# Altium PCB AVR_ISP_mkii_clone.PcbDoc
Units mm, origin at the board's own origin, x right, y up, seen from the top; angles counter-clockwise.
Board outline 57.87 x 20.93 mm, 2 copper layers (Top Layer, Bottom Layer); 38 components, 33 nets, 141 pads, 71 vias.
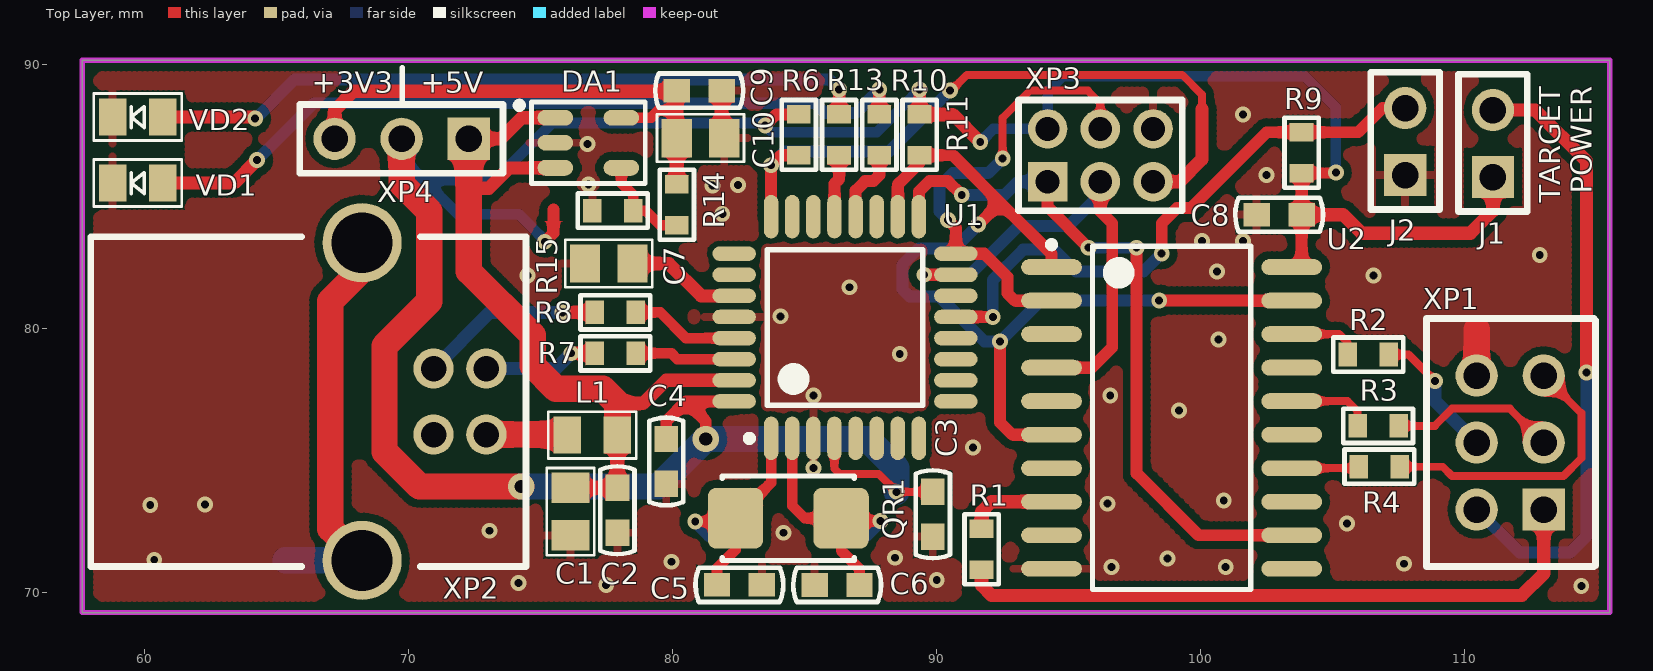
[diagram p0: Top Layer view]
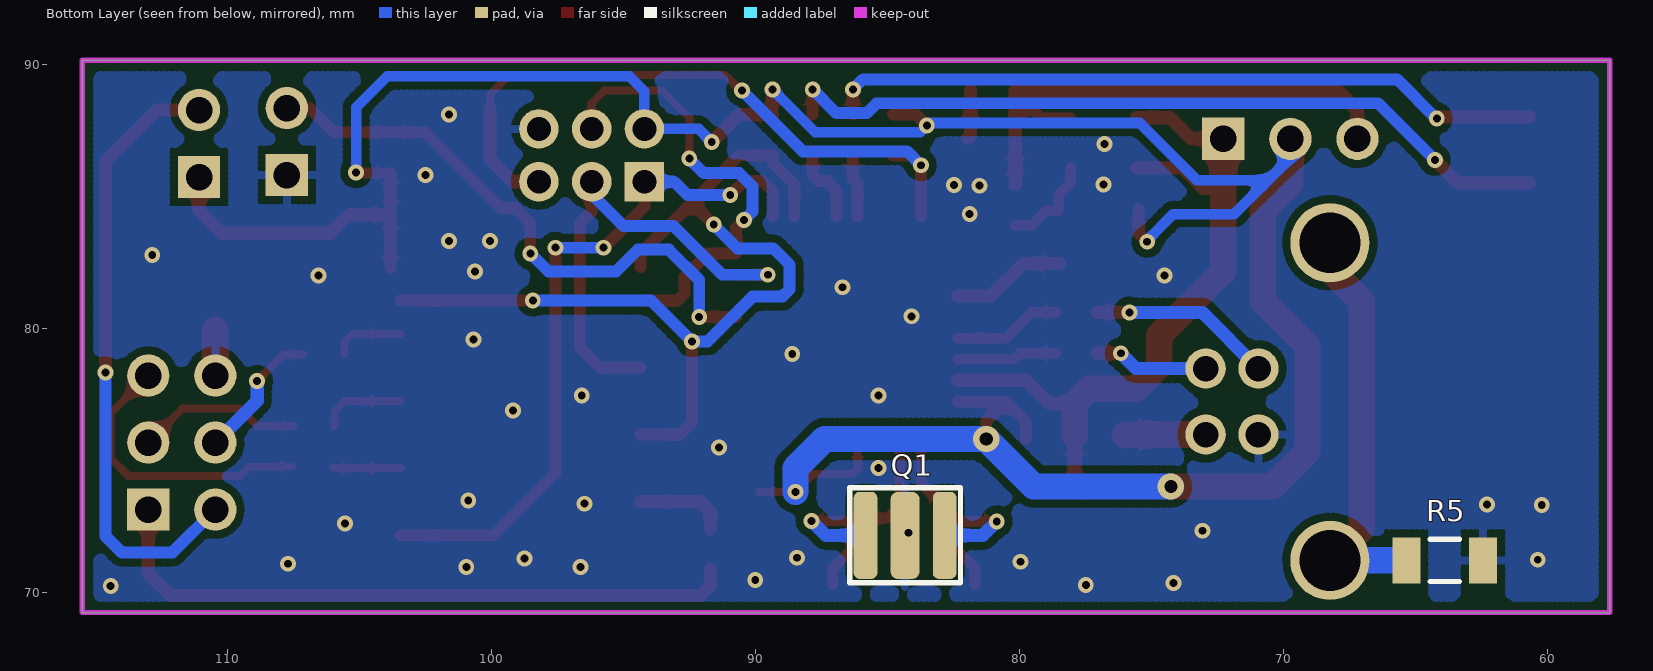
[diagram p1: Bottom Layer view, seen from below]

## Layer stack, top to bottom
Top Solder: solder mask 0.0102, Solder Resist, Dk 3.5
Top Layer: signal copper 0.0356
Dielectric 1: dielectric 0.32, FR-4, Dk 4.8
Bottom Layer: signal copper 0.0356
Bottom Solder: solder mask 0.0102, Solder Resist, Dk 3.5

## Board outline
57.625,69.25 57.625,90.175 115.5,90.175 115.5,69.25

## Design rules (kind name [scope] priority, off if disabled: settings)
Clearance Clearance_1 [InComponent('U1')] p1: gap=0.2 ignorepadtopadclearanceinfootprint=FALSE
Clearance [All] p2: gap=0.3 ignorepadtopadclearanceinfootprint=FALSE
ComponentClearance [All] p1: gap=0.1 collisioncheckmode=3 verticalgap=2540 showdistances=FALSE
HoleSize [All] p1: absolutevalues=TRUE maxlimit=10 minlimit=0.025 maxpercent=80.000 minpercent=20.000
MinimumSolderMaskSliver [All] p1: minsoldermaskwidth=0.05
PolygonConnect PolygonConnect_1 [IsVia] p1: connectstyle=Direct reliefconductorwidth=0.254 reliefentries=4 polygonreliefangle="90 Angle" airgapwidth=0.254
PolygonConnect [All] p2: connectstyle=Relief reliefconductorwidth=0.3 reliefentries=4 polygonreliefangle="90 Angle" airgapwidth=0.3
RoutingVias [All] p1: holewidth=0.4 width=0.8 viastyle="Through Hole" minholewidth=0.3 minwidth=0.6 maxholewidth=0.5 maxwidth=1
SilkToSilkClearance [All] p1: silktosilkclearance=0.1
SilkToSolderMaskClearance [IsPad] p1: minsilkscreentomaskgap=0.05 clearancetoexposedcopper=TRUE
SolderMaskExpansion [All] p1: expansion=0.102
Width [All] p1: maxlimit=3 minlimit=0.2 preferedwidth=0.5
25 further rules are at their usual default settings.

## Classes and differential pairs
component class Power: C9 C10 DA1 R14 R15
component class MCU: C3 C4 C5 C6 C7 C8 J2 Q1 QR1 R6 R7 R8 R9 R10 R11 R13 U1 U2 VD1 VD2 XP4
component class Connections: C1 C2 J1 L1 R1 R2 R3 R4 R5 XP1 XP2 XP3

## Components (designator, comment, footprint, x,y, rotation, side; value= is the part's Value field where it differs from the comment)
C1 "10uF" CC0805 76.125,73.075 r90 top
C2 "0.1uF" CC0603 77.9,73.125 r90 top
C3 "0.1uF" CC0603 89.85,72.975 r270 top
C4 "0.1uF" CC0603 79.75,74.975 r270 top
C5 "22pF" CC0603 82.525,70.3 r180 top
C6 "22pF" CC0603 86.225,70.298 r0 top
C7 "10uF" CC0805 77.575,82.475 r0 top
C8 "0.1uF" CC0603 102.975,84.325 r180 top
C9 "0.1uF" CC0603 81,89.025 r0 top
C10 "10uFx6.3V" CC0805 81.05,87.225 r180 top
DA1 "AP2210K-ADJTRG1" SOT23-5 76.8,87.05 r0 top
J1 "PLS-02" PLS-02 111.075,85.75 r90 top
J2 "PLS-02" PLS-02 107.75,85.825 r90 top
L1 "L0805" RC0805 76.95,75.975 r0 top value=10uH
Q1 "n.p" AWSCR-16MHz 84.325,72.175 r90 bottom value=AWSCR-16MHz
QR1 "16MHz" AC5032_2 84.375,72.825 r0 top
R1 "68E" RC0603 91.7,71.65 r270 top
R2 "68E" RC0603 106.35,79.025 r180 top
R3 "68E" RC0603 106.725,76.325 r0 top
R4 "68E" RC0603 106.775,74.775 r0 top
R5 "1M" RC1206 63.875,71.225 r0 bottom
R6 "10k" RC0603 84.775,87.35 r90 top
R7 "22E" RC0603 77.825,79.075 r0 top
R8 "22E" RC0603 77.825,80.625 r0 top
R9 "10k" RC0603 103.825,86.675 r270 top
R10 "220E" RC0603 87.825,87.35 r270 top
R11 "10k" RC0603 89.35,87.35 r270 top
R13 "220E" RC0603 86.3,87.35 r270 top
R14 "11k 1%" RC0603 80.15,84.7 r90 top
R15 "18k 1%" RC0603 77.725,84.475 r0 top
U1 "90USB162-16AU" 32MA_N 86.525,80.05 r90 top
U2 "SN74HC244DW" DW020_N 98.9,76.625 r0 top
VD1 "LED_0805" LED0805 60.675,85.525 r180 top
VD2 "LED_0805" LED0805 60.675,88.025 r180 top
XP1 "PLD06" PIN6 113,73.15 r90 top
XP2 "USB_B" USB-B 72.935,75.995 r0 top
XP3 "PLD2-06" PLD2-06 94.2,85.575 r0 top
XP4 "PLS03" PLS-03 72.265,87.2 r180 top

## Footprints (in the part's own frame and the unit in brackets; to place one, negate y for a bottom-side part, rotate by r counter-clockwise, add the part's x,y. Pads: shape width x height; smd on the part's side, far side on the other; paste and mask are expansions set on the pad)
32MA_N [mm] "Thin QFP, 32-Leads, Body 7x7mm, Pitch 0.8mm, IPC Medium Density"
  oval 1.65x0.55 smd mask+0.076: 1(-4.2,2.8) 2(-4.2,2) 3(-4.2,1.2) 4(-4.2,0.4) 5(-4.2,-0.4) 6(-4.2,-1.2) 7(-4.2,-2) 8(-4.2,-2.8) 17(4.2,-2.8) 18(4.2,-2) 19(4.2,-1.2) 20(4.2,-0.4) 21(4.2,0.4) 22(4.2,1.2) 23(4.2,2) 24(4.2,2.8)
  oval 0.55x1.65 smd mask+0.076: 9(-2.8,-4.2) 10(-2,-4.2) 11(-1.2,-4.2) 12(-0.4,-4.2) 13(0.4,-4.2) 14(1.2,-4.2) 15(2,-4.2) 16(2.8,-4.2) 25(2.8,4.2) 26(2,4.2) 27(1.2,4.2) 28(0.4,4.2) 29(-0.4,4.2) 30(-1.2,4.2) 31(-2,4.2) 32(-2.8,4.2)
  silkscreen extent -4.32,-2.95 2.95,3.75, body extent -3.5,-3.5 3.5,3.5, height 1.2
AC5032_2 [mm]
  rrect30% 2.1x2.3 smd mask+0.076: 1(-2,0) 2(2,0)
  silkscreen extent -2.5,-1.6 2.5,1.6
AWSCR-16MHz [mm]
  rrect50% 3.3x0.9 smd mask+0.076: 1(0,1.5) 2(0,-1.5)
  rrect50% 3.3x1.1 smd mask+0.076: 3(0,0)
  silkscreen extent -1.8,-2.1 1.8,2.1
CC0603 [mm]
  rect 1x0.9 smd paste-25.4 mask+0.076: 1(-0.85,0) 2(0.85,0)
  silkscreen extent -1.66,-0.65 1.66,0.65
CC0805 [mm]
  rect 1.15x1.45 smd paste-25.4 mask+0.076: 1(-0.9,0) 2(0.9,0)
  silkscreen extent -1.65,-0.9 1.65,0.9
DW020_N [mm] "SOIC, 20-Leads, Body 12.8x7.5mm, Pitch 1.27mm, IPC Medium Density"
  oval 2.3x0.6 smd mask+0.076: 1(-4.55,5.715) 2(-4.55,4.445) 3(-4.55,3.175) 4(-4.55,1.905) 5(-4.55,0.635) 6(-4.55,-0.635) 7(-4.55,-1.905) 8(-4.55,-3.175) 9(-4.55,-4.445) 10(-4.55,-5.715) 11(4.55,-5.715) 12(4.55,-4.445) 13(4.55,-3.175) 14(4.55,-1.905) 15(4.55,-0.635) 16(4.55,0.635) 17(4.55,1.905) 18(4.55,3.175) 19(4.55,4.445) 20(4.55,5.715)
  silkscreen extent -4.67,-6.5 3,6.69, body extent -3.75,-6.5 3.75,6.5, height 2.65
LED0805 [mm]
  rect 1.05x1.4 smd paste-25.4: 1(0,0) 2(1.9,0)
  silkscreen extent -0.72,-0.89 2.62,0.89
PIN6 [mm]
  rect 1.6x1.6 hole 1 mask+0.076: 1(0,0)
  round 1.6 hole 1 mask+0.076: 2(0,2.54) 3(2.54,0) 4(2.54,2.54) 5(5.08,0) 6(5.08,2.54)
  silkscreen extent -2.16,-1.96 7.24,4.45
PLD2-06 [mm]
  rect 1.5x1.5 hole 0.9 mask+0.076: 1(0,0)
  round 1.5 hole 0.9 mask+0.076: 2(0,2) 3(2,0) 4(2,2) 5(4,0) 6(4,2)
  silkscreen extent -1.1,-1.1 5.1,3.1
PLS-02 [mm]
  rect 1.6x1.6 hole 1 mask+0.076: 1(0,0)
  round 1.6 hole 1 mask+0.076: 2(2.54,0)
  silkscreen extent -1.3,-1.3 3.9,1.3
PLS-03 [mm]
  rect 1.6x1.6 hole 1 mask+0.076: 1(0,0)
  round 1.6 hole 1 mask+0.076: 2(2.54,0) 3(5.08,0)
  silkscreen extent -1.3,-1.3 6.4,1.3
RC0603 [mm]
  rect 0.7x0.9 smd paste-25.4 mask+0.076: 1(-0.775,0) 2(0.774,0)
  silkscreen extent -1.32,-0.65 1.33,0.65
RC0805 [mm]
  rect 1.05x1.4 smd paste-25.4 mask+0.076: 1(-0.95,0) 2(0.95,0)
  silkscreen extent -1.67,-0.89 1.67,0.89
RC1206 [mm]
  rect 1.05x1.75 smd paste-25.4 mask+0.076: 1(-1.45,0) 2(1.45,0)
  silkscreen extent -0.55,-0.8 0.55,0.8
SOT23-5 [mm]
  oval 1.35x0.6 smd mask+0.076: 1(-1.25,0.95) 2(-1.25,0) 3(-1.25,-0.95) 4(1.25,-0.95) 5(1.25,0.95)
  silkscreen extent -2.74,-1.55 2.16,1.55
USB-B [mm]
  round 1.524 hole 0.965 mask+0.076: 1(0,0) 2(0,2.5) 3(-2,2.5) 4(-2,0)
  round 3 hole 2.3 mask+0.076: 5(-4.71,7.27) 6(-4.71,-4.77)
  silkscreen extent -14.99,-5 1.5,7.5

## Part data
C1 C7 C10: library part CC0805, "CC0805"
C2 C3 C4 C5 C6 C8 C9: library part CC0603, "CC0603"
DA1: library part MCP1824T-ADJE/OT, "300 mA, Low Voltage, Low Quiescent Current LDO Regulator, 5-Pin SOT-223, Extended Temperature, Tape and Reel", ComponentLink1Description="Manufacturer Link", ComponentLink1URL=http://www.microchip.com, ComponentLink2Description=Datasheet, ComponentLink2URL=http://ww1.microchip.com/downloads/en/DeviceDoc/22070a.pdf, ComponentLink3Description="Packaging Specification", ComponentLink3URL=http://ww1.microchip.com/downloads/en/PackagingSpec/00049AW.pdf, DatasheetVersion="revA, Aug-2007", PackageDescription="5-Lead Plastic Small Outline Transistor (DC) [SOT-223]", PackageReference=SOT-223-DC5, PackageVersion="revAW, Oct-2008", Published=29-Jan-2009, Publisher="Altium Limited"
Q1: library part Q_AWSCR-16MHz, n.p=n.p
QR1: library part AC5032_2, "AC5032/2"
R1 R2 R3 R4 R6 R7 R8 R9 R10 R11 R13 R14 R15: library part RC0603, "RC0603"
R5: library part RC1206, "RC1206"
U1: "8-bit AVR Microcontroller, 2.7-5.5V, 16KB Flash, 512 Bytes EEPROM, 512 Bytes SRAM, USB Controller, 32-pin TQFP, Industrial Grade (-40°C to 85°C)", ComponentLink1Description="Manufacturer Link", ComponentLink1URL=http://www.atmel.com/products/avr/default.asp?, ComponentLink2Description="AT90USB82/162 Datasheet", ComponentLink2URL=http://www.atmel.com/dyn/resources/prod_documents/doc7707.pdf, ComponentLink3Description="AT90USB82/162 Summary", ComponentLink3URL=http://www.atmel.com/dyn/resources/prod_documents/7707S.pdf, ComponentLink4Description="Atmel.com Home", ComponentLink4URL=http://www.atmel.com, DatasheetVersion="revE, Nov-2008", PackageDescription="32-Lead Thin Profile Plastic Quad Flatpack (TQFP) - 7x7x1mm Body,  0.8 mm Pitch", PackageReference=32MA, PackageVersion="revB, Jul-2007", Published=1-Apr-2010, Publisher="Altium Limited"
U2: "Octal Buffer and Line Driver with 3-State Outputs", Code_IPC=SOIC127P1030-20, Code_JEDEC=MS-013, ComponentLink1Description="Manufacturer Link", ComponentLink1URL=http://www.ti.com/, ComponentLink2Description=Datasheet, ComponentLink2URL=http://www-s.ti.com/sc/ds/sn74hc244.pdf, DatasheetVersion=May-1997, LatestRevisionDate=13-Apr-2006, LatestRevisionNote="IPC-7351 Footprint Added.", PackageDescription="20-Pin Plastic Small Outline Integrated Circuit 1.27 mm Pitch", PackageReference=DW020, PackageVersion=Mar-2000, Published=8-Jun-2000, Publisher="Altium Limited"

## Via types
v1: diameter 0.6, hole 0.3, Top Layer to Bottom Layer, tented both sides, 69 vias
v2: diameter 1, hole 0.5, Top Layer to Bottom Layer, tented both sides, 2 vias

## Nets (pads, with @x,y where several pads share a name; then routed paths per layer and width w, separated by ;. In a path a pad name is that pad's centre, name@x,y a point inside that pad or via, vN(x,y) a via of type N, cw(c..) or ccw(c..) an arc to the next point about the centre after c; other vN are vias at no path point)
+3V3: C9.1 C10.2 DA1.5 R14.2 XP4.3 | length 20.1
  Top Layer w0.4: DA1.5 79.175,88 79.45,88.275 80.15,88.275
  Top Layer w0.5: XP4.3 67.185,88.285 67.9,89 80.125,89 C9.1 80.15,88.275 R14.2
ACTIVITY: R10.2 U1.20 | length 2.9
  Top Layer w0.45: U1.20 86.925,85.239 87.286,85.6 87.6,85.6 87.825,85.825 R10.2
GND: C1.1 C2.1 C3.2 C4.2 C5.1 C6.1 C7.1 C8.2 C9.2 C10.1 DA1.2 J2.1 Q1.3 R5.1 R15.1 U1.3 U1.28 U2.10 VD1.2 VD2.2 XP1.6 XP2.4 XP3.6 | length 3.6
  Top Layer w0.5: C9.2 81.85,87.325 C10.1
  Top Layer w1: XP1.6 110.46,79.965
  other v1: 114.425,70.25 77.475,70.3 74.15,70.375 90,70.488 96.625,70.975 100.95,70.975 107.7,71.1 79.95,71.175 60.35,71.25 98.75,71.3 88.425,71.325 84.2,72.275 73.05,72.35 105.55,72.625 60.2,73.325 62.275,73.35 96.475,73.375 100.875,73.5 85.325,74.725 91.375,75.5 99.175,76.9 85.325,77.475 96.575,77.475 88.6,79.05 100.675,79.6 84.075,80.475 86.7,81.575 74.5,82.025 106.55,82.025 100.625,82.175 112.85,82.8 100.05,83.325 101.6,83.325 81.875,84.35 81.5,85.425 82.475,85.45 76.8,85.475 102.5,85.825 76.774,87 101.6,88.125
MISO: U1.17 U2.12 XP3.1 | length 26.8
  Top Layer w0.45: U1.17 89.325,85.2 89.725,85.6 90.425,85.6 v1(90.95,85.075) ; XP3.1 94.2,84.625 v1(95.75,83.075) ; v1(97.575,83.075) 97.575,74.525 99.92,72.18 U2.12
  Bottom Layer w0.45: v1(90.95,85.075) 92.575,85.075 93.075,85.575 XP3.1 ; v1(95.75,83.075) v1(97.575,83.075)
MOSI: U1.16 U2.2 XP3.4 | length 17.2
  Top Layer w0.3: v1(92.5,86.45) 92.5,88 93.525,89.025 95.725,89.025 96.2,88.55 XP3.4
  Top Layer w0.45: v1(90.425,84.125) 90.725,83.825 U1.16 91.8,82.85 92.675,81.975 92.675,81.35 92.955,81.07 U2.2
  Bottom Layer w0.45: v1(90.425,84.125) 90.1,84.45 90.1,85.392 90.608,85.9 91.95,85.9 v1(92.5,86.45)
NetC5_2: C5.2 Q1.2 QR1.1 U1.1 | length 10.2
  Top Layer w0.4: v1(80.85,72.7) 82.25,72.7 QR1.1 ; C5.2 81.675,70.925 82.375,71.625 QR1.1 ; U1.1 83.725,74.175 QR1.1
  Bottom Layer w0.5: v1(80.85,72.7) 81.375,72.175 Q1.2
NetC6_2: C6.2 Q1.1 QR1.2 U1.2 | length 11.2
  Top Layer w0.4: U1.2 84.525,73.3 85,72.825 QR1.2 ; C6.2 87.075,70.9 86.375,71.6 QR1.2 ; v1(87.875,72.725) 86.475,72.725 QR1.2
  Bottom Layer w0.5: Q1.1 87.325,72.175 v1(87.875,72.725)
NetC7_2: C7.2 U1.27 | length 4.4
  Top Layer w0.5: C7.2 79.85,82.475 81.075,81.25 U1.27
NetDA1_4: DA1.4 R14.1 R15.2 | length 3.7
  Top Layer w0.4: DA1.4 78.05,85.525 78.499,85.076 R15.2 78.975,84.475 79.525,83.925 R14.1
NetJ1_2: J1.2 XP1.2 | length 23.7
  Top Layer w0.5: J1.2 112.685,88.29 114.625,86.35 v1(114.625,78.35)
  Bottom Layer w0.45: XP1.2 112.085,71.525 114,71.525 114.625,72.15 v1(114.625,78.35)
NetJ2_2: J2.2 R9.1 U1.13 | length 22.5
  Top Layer w0.45: U1.13 v1(92.125,80.45) ; v1(98.525,82.858) 98.525,84 99.1,84.575 99.625,84.575 102.5,87.45 R9.1 105.975,87.45 106.89,88.365 J2.2
  Bottom Layer w0.45: v1(92.125,80.45) 92.125,81.85 93.275,83 94.45,83 95.275,82.175 97.842,82.175 v1(98.525,82.858)
NetL1_1: L1.1 XP2.1 | length 3.1
  Top Layer w1: XP2.1 75.98,75.995 L1.1
NetR1_1: R1.1 U2.8 | length 3.5
  Top Layer w0.5: R1.1 91.7,73.075 92.075,73.45 U2.8
NetR1_2: R1.2 XP1.1 | length 24.8
  Top Layer w0.5: R1.2 91.7,70.275 92.075,69.9 112.175,69.9 113,70.725 XP1.1
NetR2_1: R2.1 XP1.4 | length 5.2
  Top Layer w0.3: R2.1 107.875,79.025 v1(108.875,78.025)
  Bottom Layer w0.5: v1(108.875,78.025) 108.875,77.275 XP1.4
NetR2_2: R2.2 U2.18 | length 2.7
  Top Layer w0.3: U2.18 105.25,79.8 105.576,79.474 R2.2
NetR3_1: R3.1 U2.16 | length 3.2
  Top Layer w0.3: U2.16 105.565,77.26 105.95,76.875 R3.1
NetR3_2: R3.2 XP1.3 | length 6.3
  Top Layer w0.3: R3.2 108.875,76.325 109.525,76.975 111.715,76.975 XP1.3
NetR4_1: R4.1 U2.14 | length 2.6
  Top Layer w0.3: U2.14 105.945,74.72 R4.1
NetR4_2: R4.2 XP1.5 | length 11
  Top Layer w0.3: R4.2 109.175,74.775 109.525,74.425 113.75,74.425 114.425,75.1 114.425,76.805 XP1.5
NetR5_2: R5.2 XP2.5 XP2.6 | length 15.9
  Top Layer w1: XP2.6 67.025,72.425 67.025,81.05 68.225,82.25 XP2.5
  Bottom Layer w1: R5.2 XP2.6
NetR6_1: R6.1 U1.24 XP3.5 | length 25.9
  Top Layer w0.3: v1(90.5,89.025) 90.55,89.025 91.15,89.625 99.3,89.625 100.05,88.875 100.05,88.325
  Top Layer w0.45: U1.24 v1(83.725,86.2) 84.1,86.575 R6.1
  Top Layer w0.5: XP3.5 99.2,85.575 100.05,86.425 100.05,88.325
  Bottom Layer w0.45: v1(83.725,86.2) 84.25,86.725 88.2,86.725 v1(90.5,89.025)
NetR7_1: R7.1 XP2.2 | length 4.4
  Top Layer w0.5: v1(76.15,79.075) R7.1
  Bottom Layer w0.5: XP2.2 75.57,78.495 v1(76.15,79.075)
NetR7_2: R7.2 U1.30 | length 3.8
  Top Layer w0.4: R7.2 79.95,79.075 80.175,78.85 U1.30
NetR8_1: R8.1 XP2.3 | length 7
  Top Layer w0.5: v1(75.825,80.625) R8.1
  Bottom Layer w0.5: XP2.3 73.065,80.625 v1(75.825,80.625)
NetR8_2: R8.2 U1.29 | length 4.1
  Top Layer w0.4: R8.2 79.525,80.625 80.5,79.65 U1.29
NetR10_1: R10.1 VD1.1 | length 29.9
  Top Layer w0.45: R10.1 v1(87.825,89.075)
  Top Layer w0.5: VD1.1 63.375,85.525 v1(64.25,86.4)
  Bottom Layer w0.45: v1(64.25,86.4) 66.399,88.549 85.401,88.549 85.775,88.175 86.925,88.175 v1(87.825,89.075)
NetR13_1: R13.1 VD2.1 | length 27.4
  Top Layer w0.45: R13.1 v1(86.3,89.075)
  Top Layer w0.5: VD2.1 64.125,88.025 v1(64.175,87.975)
  Bottom Layer w0.45: v1@64.175,87.95 65.675,89.45 85.925,89.45 v1(86.3,89.075)
READY: R13.2 U1.21 | length 2.4
  Top Layer w0.45: U1.21 86.125,85.5 86.3,85.675 R13.2
RESET: R11.2 U1.18 U2.1 U2.6 U2.19 | length 36.7
  Top Layer w0.45: U1.18 88.525,85.464 88.575,85.514 88.575,85.525 89.35,86.3 R11.2 90.616,86.576 92.408,84.783 ; v1(91.575,83.95) 92.408,84.783 ; v1(92.4,79.525) 92.4,76.45 92.86,75.99 U2.6 ; U2.1 94.35,82.842 92.408,84.783 ; v1(98.43,81.07) U2.19
  Bottom Layer w0.45: v1(91.575,83.95) 90.675,83.05 89.325,83.05 88.7,82.425 88.7,81.5 88.975,81.225 90.1,81.225 91.8,79.525 v1(92.4,79.525) 93.945,81.07 v1(98.43,81.07)
SCK: U1.15 U2.4 XP3.3 | length 18.7
  Top Layer w0.45: v1(89.525,82.05) U1.15 ; U2.4 95.88,78.53 96.65,79.3 96.65,84 96.2,84.45 XP3.3
  Bottom Layer w0.45: v1(89.525,82.05) 91.25,82.05 93.1,83.9 95,83.9 96.2,85.1 XP3.3
VBUS: C1.2 C2.2 DA1.1 DA1.3 L1.2 U1.31 XP4.1 | length 30.5
  Top Layer w0.5: 72.265,85.2 72.39,85.325 73.025,85.325 73.8,86.1 DA1.3 ; XP4.1 73.475,87.2 74.275,88 DA1.1 ; C1.2 C2.2 ; L1.2 C2.2 ; 77.9,77.175 78.875,77.175 79.75,78.05 U1.31 ; C2.2@77.925,74 C2.2
  Top Layer w1: XP4.1 72.265,85.2 72.265,82.185 74.7,79.75 74.7,78.6 75.575,77.725 77.35,77.725 77.9,77.175 L1.2
VCC: C3.1 C4.1 C8.1 J1.1 R6.2 R9.2 R11.1 U1.4 U1.32 U2.20 XP3.2 XP4.2 | length 112.4
  Top Layer w0.3: U1.4 86.125,74.7 86.325,74.5 87.8,74.5 v1(88.475,73.825) C3.1
  Top Layer w0.4: R9.2 105.101,85.901 v1(105.125,85.925)
  Top Layer w0.45: v1(75.15,83.3) 75.474,83.624 75.474,84.525 ; C4.1@79.75,76.25 79.75,76.5 80.5,77.25 ; v2(81.25,75.825) 81.25,76.5 80.5,77.25 ; U1.32 80.5,77.25 ; v1(83.5,87.7) 83.924,88.124 R6.2 ; R11.1 v1(89.35,89.075) ; U2.20@103.825,82.315 C8.1 R9.2
  Top Layer w0.453: C4.1 C4.1@79.75,76.25
  Top Layer w0.5: R11.1 90.6,88.125 v1(91.65,87.075) ; C8.1 105.4,84.325 106.1,83.625 110.225,83.625 111.075,84.475 J1.1
  Top Layer w1: XP4.2 69.725,85.5 70.775,84.45 70.775,81.05 69.075,79.35 69.075,75.35 70.4,74.025 v2(74.25,74.025)
  Bottom Layer w0.4: XP4.2 69.725,86.475 70.563,85.638 ; v1(75.15,83.3) 75.15,83.356 74.156,84.35 71.85,84.35 70.563,85.638 ; v1(89.35,89.075) 87.725,87.45 83.75,87.45 v1(83.5,87.7) 83.4,87.8 75.425,87.8 73.263,85.638 70.563,85.638 ; v1(91.65,87.075) 92.15,87.575 XP3.2 94.2,89 94.775,89.575 103.95,89.575 105.125,88.4 v1(105.125,85.925)
  Bottom Layer w1: v2(74.25,74.025) 79.45,74.025 v2(81.25,75.825) 87.375,75.825 88.475,74.725 v1(88.475,73.825)
pads on no net: U1.5 U1.6 U1.7 U1.8 U1.9 U1.10 U1.11 U1.12 U1.14 U1.19 U1.22 U1.23 U1.25 U1.26 U2.3 U2.5 U2.7 U2.9 U2.11 U2.13 U2.15 U2.17

## Polygon pours and split planes (outlines as drawn)
GND on Bottom Layer "GND_L02_P002" (hatched 90Degree grid 0.2 track 0.5, remove dead copper, pour order 2): 57.625,90.175 115.5,90.175 115.5,69.25 57.625,69.25
GND on Top Layer "GND_L01_P000" (hatched 90Degree grid 0.2 track 0.5, remove dead copper, pour order 0): 57.625,90.175 115.5,90.175 115.5,69.25 57.625,69.25

## Keep-outs
Keep-Out Layer:
  the board outline again, w0.2

## Silkscreen, mask and mechanical layers (free items; w line width, h text height)
Top Overlay:
  lines w0.2: 69.75,88.5 69.75,89.9
  text "+3V3" at 66.325,88.95 h0.8
  text "+5V" at 70.45,88.95 h0.8
  text "POWER" at 114.825,85.125 h0.8 r90
  text "TARGET" at 113.625,84.775 h0.8 r90